# Altium PCB Copy of PCB1.PcbDoc (part 2 of 9)
Units mm, origin at the board's own origin, x right, y up, seen from the top; angles counter-clockwise.
Board outline 100 x 100 mm, 6 copper layers (Top Layer, Int1 (GND), Int2 (Sign), Int3 (Sign), Int4 (PWR), Bottom Layer), stack 1.538 mm thick; 614 components, 712 nets, 3013 pads, 501 vias.
Unrouted connection lines stored in the file: 259.
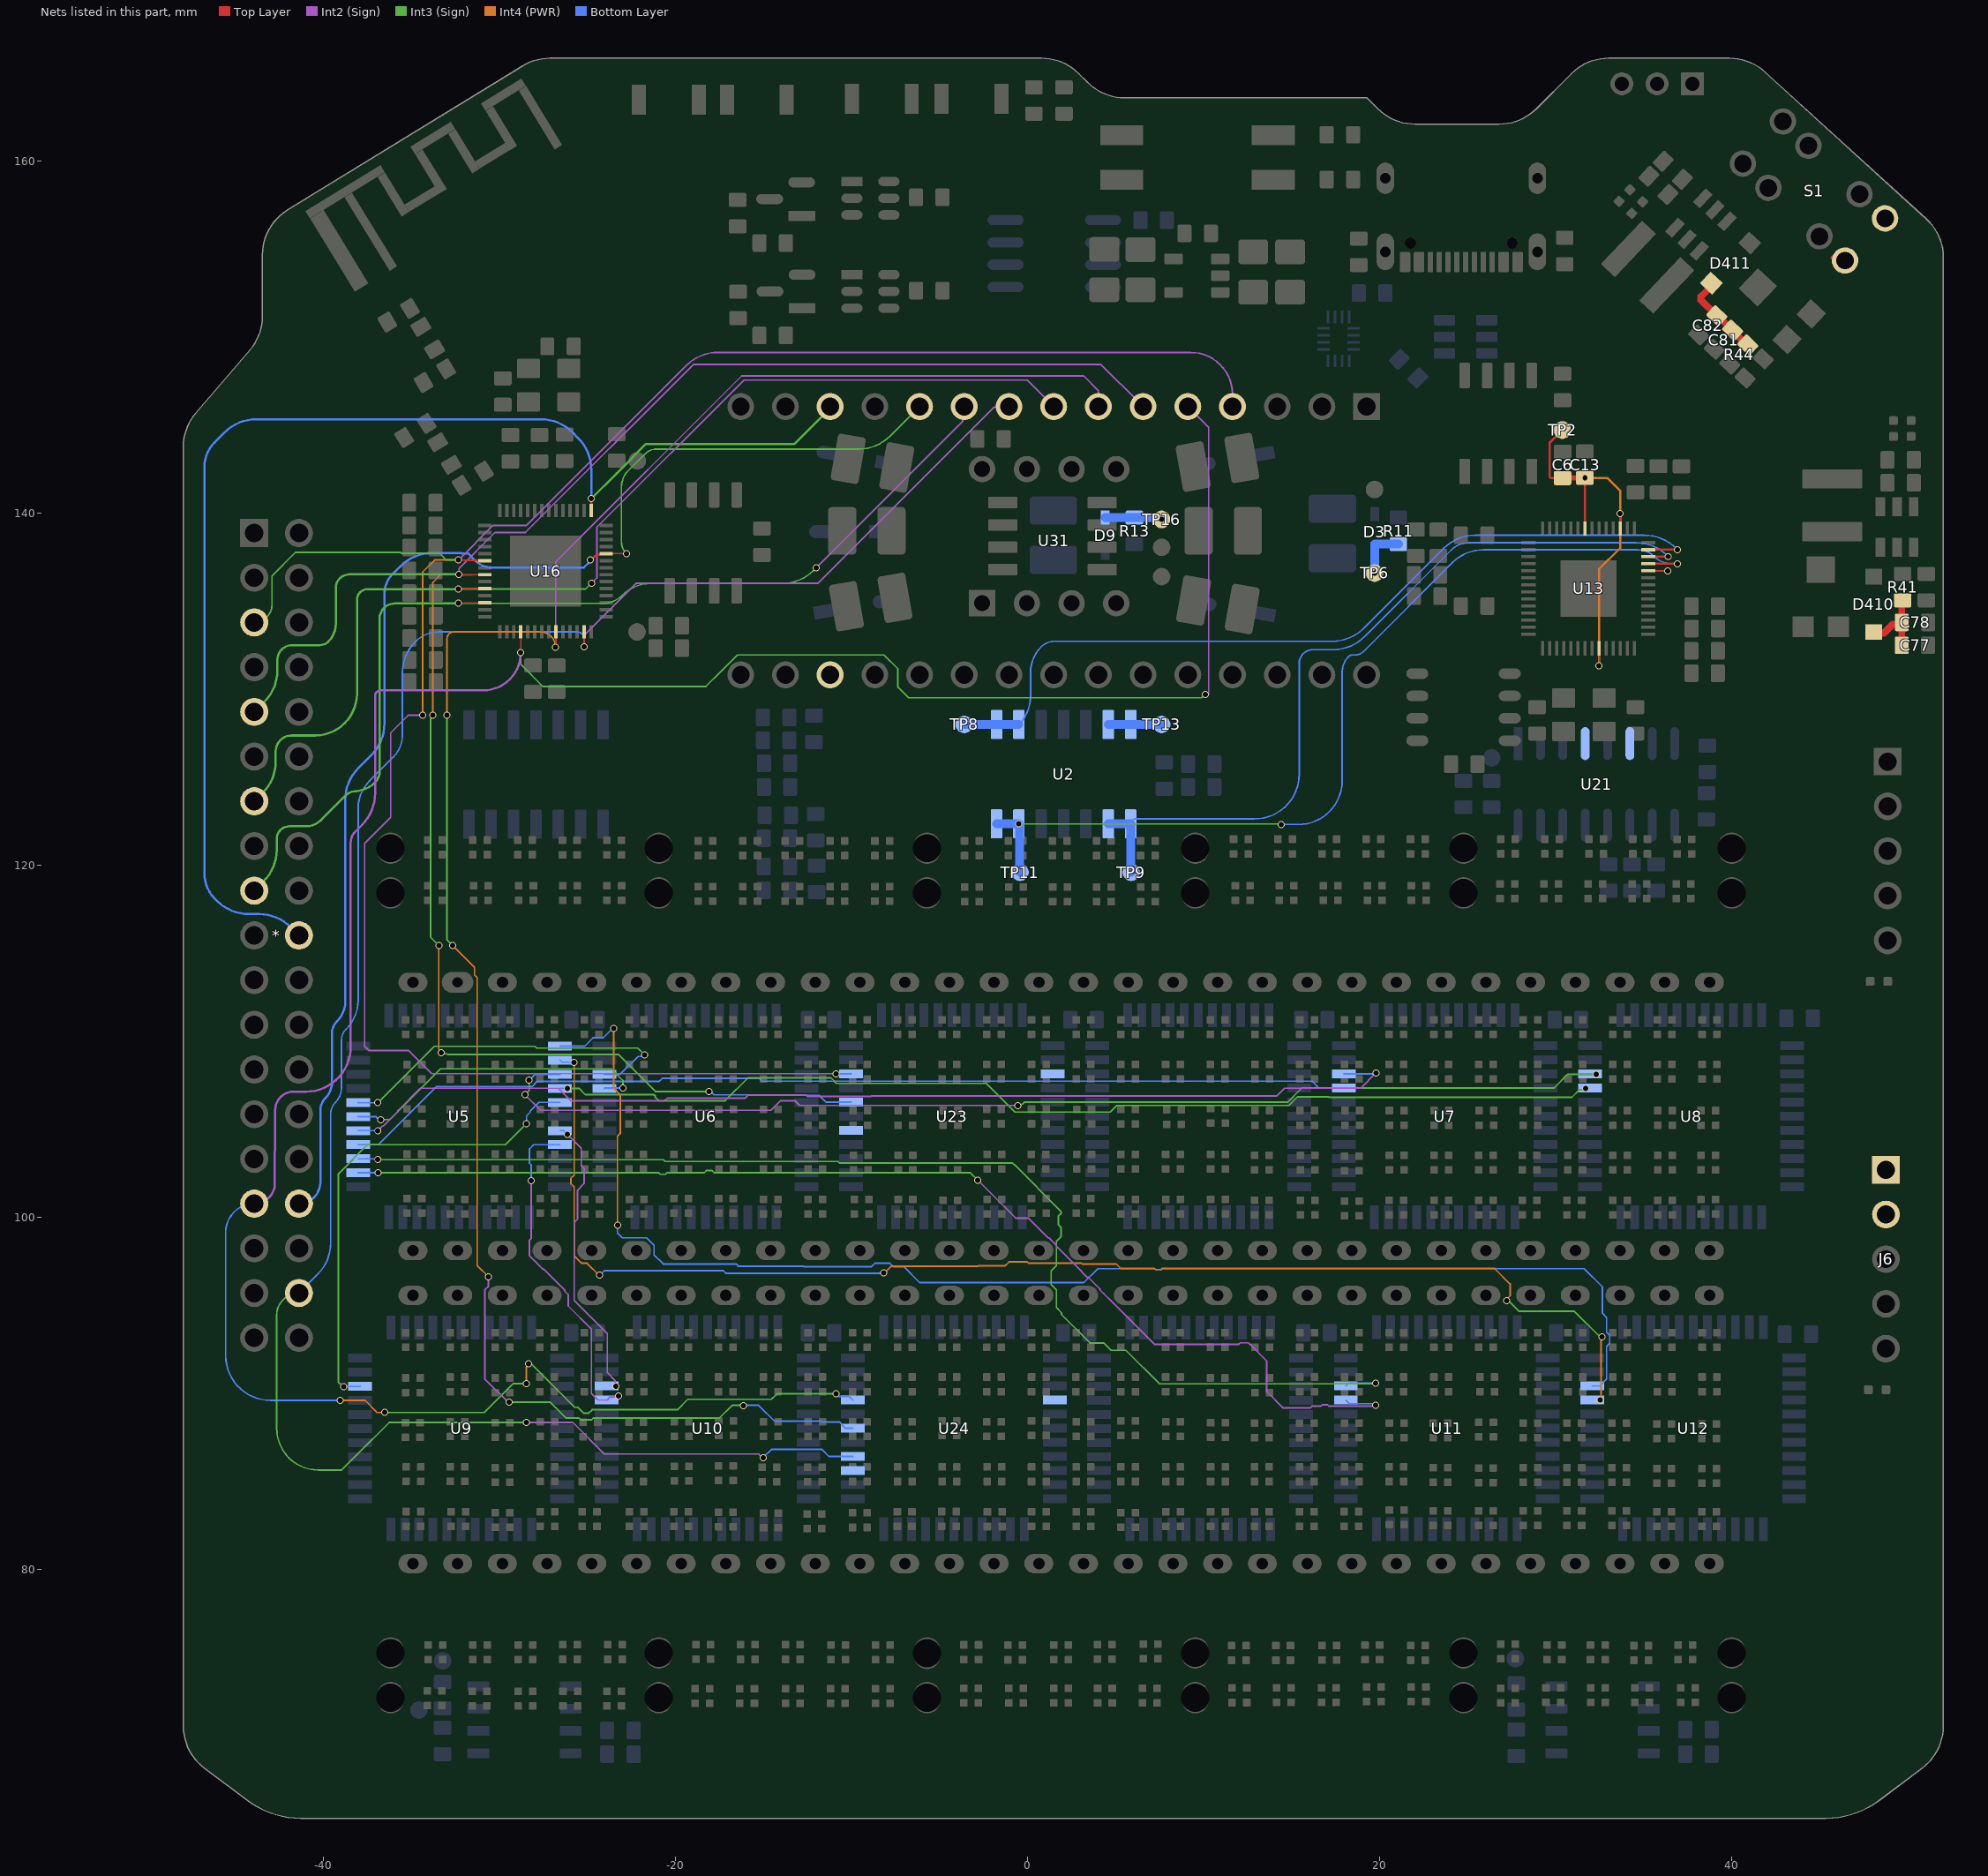
[diagram p6: the nets of this part, all layers, seen from the top]

## Footprints (in the part's own frame and the unit in brackets; to place one, negate y for a bottom-side part, rotate by r counter-clockwise, add the part's x,y. Pads: shape width x height; smd on the part's side, far side on the other; paste and mask are expansions set on the pad) (continued)
Breadboard_CustomClips_CorrectPins_1 [mm]
  rrect100% 1.65x1.1 hole 0.65 slot 1.45 at 0 deg: 1(-36.83,1.27) 1(-36.83,16.51) 2(-34.29,1.27) 3(-31.75,1.27) 3(-31.75,16.51) 4(-29.21,1.27) 4(-29.21,16.51) 5(-26.67,1.27) 5(-26.67,16.51) 6(-24.13,1.27) 6(-24.13,16.51) 7(-21.59,1.27) 7(-21.59,16.51) 8(-19.05,1.27) 8(-19.05,16.51) 9(-16.51,1.27) 9(-16.51,16.51) 10(-13.97,1.27) 10(-13.97,16.51) 11(-11.43,1.27) 11(-11.43,16.51) 12(-8.89,1.27) 12(-8.89,16.51) 13(-6.35,1.27) 13(-6.35,16.51) 14(-3.81,1.27) 14(-3.81,16.51) 15(-1.27,1.27) 15(-1.27,16.51) 16(1.27,1.27) 16(1.27,16.51) 17(3.81,1.27) 17(3.81,16.51) 18(6.35,1.27) 18(6.35,16.51) 19(8.89,1.27) 19(8.89,16.51) 20(11.43,1.27) 20(11.43,16.51) 21(13.97,1.27) 21(13.97,16.51) 22(16.51,1.27) 22(16.51,16.51) 23(19.05,1.27) 23(19.05,16.51) 24(21.59,1.27) 24(21.59,16.51) 25(24.13,1.27) 25(24.13,16.51) 26(26.67,1.27) 26(26.67,16.51) 27(29.21,1.27) 27(29.21,16.51) 28(31.75,1.27) 28(31.75,16.51) 29(34.29,1.27) 29(34.29,16.51) 30(36.83,1.27) 30(36.83,16.51) 31(-36.83,-16.51) 31(-36.83,-1.27) 32(-34.29,-16.51) 32(-34.29,-1.27) 33(-31.75,-16.51) 33(-31.75,-1.27) 34(-29.21,-16.51) 34(-29.21,-1.27) 35(-26.67,-16.51) 35(-26.67,-1.27) 36(-24.13,-16.51) 36(-24.13,-1.27) 37(-21.59,-16.51) 37(-21.59,-1.27) 38(-19.05,-16.51) 38(-19.05,-1.27) 39(-16.51,-16.51) 39(-16.51,-1.27) 40(-13.97,-16.51) 40(-13.97,-1.27) 41(-11.43,-16.51) 41(-11.43,-1.27) 42(-8.89,-16.51) 42(-8.89,-1.27) 43(-6.35,-16.51) 43(-6.35,-1.27) 44(-3.81,-16.51) 44(-3.81,-1.27) 45(-1.27,-16.51) 45(-1.27,-1.27) 46(1.27,-16.51) 46(1.27,-1.27) 47(3.81,-16.51) 47(3.81,-1.27) 48(6.35,-16.51) 48(6.35,-1.27) 49(8.89,-16.51) 49(8.89,-1.27) 50(11.43,-16.51) 50(11.43,-1.27) 51(13.97,-16.51) 51(13.97,-1.27) 52(16.51,-16.51) 52(16.51,-1.27) 53(19.05,-16.51) 53(19.05,-1.27) 54(21.59,-16.51) 54(21.59,-1.27) 55(24.13,-16.51) 55(24.13,-1.27) 56(26.67,-16.51) 56(26.67,-1.27) 57(29.21,-16.51) 57(29.21,-1.27) 58(31.75,-16.51) 58(31.75,-1.27) 59(34.29,-16.51) 59(34.29,-1.27) 60(36.83,-16.51) 60(36.83,-1.27)
  rrect100% 1.8x1.2 hole 0.6 slot 1.5 at 0 deg: 2(-34.29,16.51)
  rrect100% 1.5x1.8 hole 1.6 slot 0.9 at 0 deg: 61(-38.1,24.13) 61(-22.86,24.13) 61(-7.62,24.13) 61(7.62,24.13) 61(22.86,24.13) 61(38.1,24.13) 62(-38.1,21.59) 62(-22.86,21.59) 62(-7.62,21.59) 62(7.62,21.59) 62(22.86,21.59) 62(38.1,21.59) 63(-38.1,-21.59) 63(-22.86,-21.59) 63(-7.62,-21.603) 63(7.62,-21.59) 63(22.86,-21.59) 63(38.1,-21.59) 64(-38.1,-24.13) 64(-22.86,-24.13) 64(-7.62,-24.13) 64(7.62,-24.13) 64(22.86,-24.13) 64(38.1,-24.13)
  silkscreen extent -40.64,-27.94 41.91,26.67
CAP_0603 [mm]
  rrect25% 0.8x1 smd: 1(-0.75,0) 2(0.75,0)
  body extent -0.8,-0.4 0.8,0.4, height 0.51
CAP_0805 [mm]
  rrect25% 1.4x1.7 smd: 1(-1.143,0) 2(1.143,0)
  body extent -1.15,-0.76 1.15,0.79, height 1.01
CAP_1210 [mm]
  rrect25% 1.6x2.7 smd: 1(-1.4,0) 2(1.4,0)
  body extent -1.6,-1.25 1.6,1.25, height 2.5
CTS-219-2LPST_V [mil] "SMD, 4-Leads, Body 6.706x6.553mm, Pitch 2.54mm"
  rect 96x44 smd: 1(-169.5,50) 2(-169.5,-50) 3(169.5,-50) 4(169.5,50)
  silkscreen extent -244,-129 132,129, body extent -132,-129 132,129, height 163
D0008A_L [mm] "SOIC, 8-Leads, Body 5x4mm, Pitch 1.27mm, IPC High Density"
  rrect18% 1.25x0.55 smd: 1(-2.625,1.905) 2(-2.625,0.635) 3(-2.625,-0.635) 4(-2.625,-1.905) 5(2.625,-1.905) 6(2.625,-0.635) 7(2.625,0.635) 8(2.625,1.905)
  silkscreen extent -2.75,-2.5 1.6,2.85, body extent -3,-2.45 3,2.45, height 1.63
D0008A_M [mm] "SOIC, 8-Leads, Body 5x4mm, Pitch 1.27mm, IPC Low Density"
  rrect15% 1.65x0.65 smd: 1(-2.825,1.905) 2(-2.825,0.635) 3(-2.825,-0.635) 4(-2.825,-1.905) 5(2.825,-1.905) 6(2.825,-0.635) 7(2.825,0.635) 8(2.825,1.905)
  silkscreen extent -2.95,-2.5 1.6,2.9, body extent -3,-2.45 3,2.45, height 1.63
D0014A_M [mm] "SOIC, 14-Leads, Body 8.75x4mm, Pitch 1.27mm, IPC Low Density"
  rrect15% 1.65x0.65 smd: 1(-2.825,3.81) 2(-2.825,2.54) 3(-2.825,1.27) 4(-2.825,0) 5(-2.825,-1.27) 6(-2.825,-2.54) 7(-2.825,-3.81) 8(2.825,-3.81) 9(2.825,-2.54) 10(2.825,-1.27) 11(2.825,0) 12(2.825,1.27) 13(2.825,2.54) 14(2.825,3.81)
  silkscreen extent -2.95,-4.38 1.6,4.81, body extent -3.02,-4.32 3.02,4.32, height 1.59
FAIR-SOD-523F-2_V [mm] "SMD, 2-Leads, Body 1.2x0.8mm, Height 0.7mm"
  rect 0.8x0.5 smd: 1(-1,0) 2(1,0)
  silkscreen extent -0.2,-0.38 0.24,0.38, body extent -0.6,-0.4 0.6,0.4, height 0.71
FP-22-28-6054-MFG [mm]
  rect 1.57x1.57 hole 1.02 paste-2539.97 mask+0: 1(5.08,0)
  round 1.57 hole 1.02 paste-2539.97 mask+0: 2(2.54,0) 3(0,0) 4(-2.54,0) 5(-5.08,0)
  silkscreen extent -6.48,-1.37 7.2,1.37, body extent -6.58,-9.52 6.58,1.47, height 0.25
FP-318-08-IPC_B [mm]
  rect 1.524x0.578 smd paste+0 mask+0: 1(-0.91,0.95)
  rrect100% 1.524x0.578 smd paste+0 mask+0: 2(-0.91,-0.95) 3(0.91,0)
  silkscreen extent -0.65,-1.45 0.65,1.45, body extent -1.92,-1.7 1.92,1.7, height 0.25
FP-951103-8622-AR-MFG [mm]
  rect 1.3x1.3 hole 0.8 paste-2539.97 mask+0: 1(-2,0)
  round 1.3 hole 0.8 paste-2539.97 mask+0: 2(0,0) 3(2,0)
  silkscreen extent -3.68,-1.1 3.1,1.1, body extent -3.2,-1.2 3.2,1.2, height 0.25
FP-B3U-1000P-MFG [mm]
  rect 0.8x1.7 smd paste+0 mask+0: 1(-1.7,0) 2(1.7,0)
  silkscreen extent -1.6,-1.35 1.6,1.35, body extent -2.2,-1.45 2.2,1.45, height 0.25
FP-DBV0006A-IPC_C [mm]
  rect 1.205x0.53 smd paste+0 mask+0: 1(-1.05,0.95)
  rrect100% 1.205x0.53 smd paste+0 mask+0: 2(-1.05,0) 3(-1.05,-0.95) 4(1.05,-0.95) 5(1.05,0) 6(1.05,0.95)
  silkscreen extent -2.33,-1.45 0.05,1.45, body extent -1.75,-1.55 1.75,1.55, height 0.25
FP-SO16_Narrow-0016020-IPC_C [mm]
  rect 1.874x0.501 smd paste+0 mask+0: 1(-2.316,4.445)
  rrect100% 1.874x0.501 smd paste+0 mask+0: 2(-2.316,3.175) 3(-2.316,1.905) 4(-2.316,0.635) 5(-2.316,-0.635) 6(-2.316,-1.905) 7(-2.316,-3.175) 8(-2.316,-4.445) 9(2.316,-4.445) 10(2.316,-3.175) 11(2.316,-1.905) 12(2.316,-0.635) 13(2.316,0.635) 14(2.316,1.905) 15(2.316,3.175) 16(2.316,4.445)
  silkscreen extent -4.25,-4.95 0.88,4.95, body extent -3,-4.95 3,4.95, height 1.75
FP-SOD123-IPC_A [mm]
  rect 1.557x0.742 smd paste+0 mask+0: 1(-1.7,0)
  rrect100% 1.557x0.742 smd paste+0 mask+0: 2(1.7,0)
  silkscreen extent -3.39,-0.78 1.33,0.78, body extent -1.83,-0.78 1.83,0.78, height 1.45
FP-SOD123-MFG [mm]
  rect 0.9x0.95 smd paste+0 mask+0: 1(-1.575,0) 2(1.575,0)
  silkscreen extent -2.75,-0.85 0.75,0.85, body extent -2.12,-0.95 2.12,0.95, height 0.25
HDR-TH_38P-P2.54-H-M-R2-C19-S2.54 [mm]
  rect 1.6x1.6 hole 1.05: 1(-22.86,-1.27)
  round 1.6 hole 1.05: 2(-22.86,1.27) 3(-20.32,-1.27) 4(-20.32,1.27) 5(-17.78,-1.27) 6(-17.78,1.27) 7(-15.24,-1.27) 8(-15.24,1.27) 9(-12.7,-1.27) 10(-12.7,1.27) 11(-10.16,-1.27) 12(-10.16,1.27) 13(-7.62,-1.27) 14(-7.62,1.27) 15(-5.08,-1.27) 16(-5.08,1.27) 17(-2.54,-1.27) 18(-2.54,1.27) 19(0,-1.27) 20(0,1.27) 21(2.54,-1.27) 22(2.54,1.27) 23(5.08,-1.27) 24(5.08,1.27) 25(7.62,-1.27) 26(7.62,1.27) 27(10.16,-1.27) 28(10.16,1.27) 29(12.7,-1.27) 30(12.7,1.27) 31(15.24,-1.27) 32(15.24,1.27) 33(17.78,-1.27) 34(17.78,1.27) 35(20.32,-1.27) 36(20.32,1.27) 37(22.86,-1.27) 38(22.86,1.27)
  silkscreen extent -24.31,-11.31 24.31,-2.81, body extent -24.14,-11.31 24.13,1.59, height 5
IC57_RP2040 [mil]
  rect 32x7 smd paste+0 mask+0: 1(-134,102.36) 2(-134,86.61) 3(-134,70.87) 4(-134,55.12) 5(-134,39.37) 6(-134,23.62) 7(-134,7.87) 8(-134,-7.87) 9(-134,-23.62) 10(-134,-39.37) 11(-134,-55.12) 12(-134,-70.87) 13(-134,-86.61) 14(-134,-102.36) 29(134,-102.36) 30(134,-86.61) 31(134,-70.87) 32(134,-55.12) 33(134,-39.37) 34(134,-23.62) 35(134,-7.87) 36(134,7.87) 37(134,23.62) 38(134,39.37) 39(134,55.12) 40(134,70.87) 41(134,86.61) 42(134,102.36)
  rect 7x32 smd paste+0 mask+0: 15(-102.36,-134) 16(-86.61,-134) 17(-70.87,-134) 18(-55.12,-134) 19(-39.37,-134) 20(-23.62,-134) 21(-7.87,-134) 22(7.87,-134) 23(23.62,-134) 24(39.37,-134) 25(55.12,-134) 26(70.87,-134) 27(86.61,-134) 28(102.36,-134) 43(102.36,134) 44(86.61,134) 45(70.87,134) 46(55.12,134) 47(39.37,134) 48(23.62,134) 49(7.87,134) 50(-7.87,134) 51(-23.62,134) 52(-39.37,134) 53(-55.12,134) 54(-70.87,134) 55(-86.61,134) 56(-102.36,134)
  rect 126x126 smd paste-63 mask+0: 57(0,0)
  silkscreen extent -170,-170 170,170, body extent -138,-138 138,138, height 35
IND_0603 [mm]
  rrect25% 0.8x1 smd: 1(-0.75,0) 2(0.75,0)
  body extent -0.81,-0.37 0.81,0.37, height 0.87
LED_0603_RED [mm]
  rrect25% 0.8x1 smd: A(0.75,0) K(-0.75,0)
  silkscreen extent -1.5,-0.8 -0.8,0.8, body extent -0.8,-0.4 0.8,0.4, height 0.6
MODULE_ABX00053 [mil]
  rect 60x60 / inner round 60 / far side rect 60x60 hole 40: 1(-700,-300)
  round 60 hole 40: 2(-600,-300) 3(-500,-300) 4(-400,-300) 5(-300,-300) 6(-200,-300) 7(-100,-300) 8(0,-300) 9(100,-300) 10(200,-300) 11(300,-300) 12(400,-300) 13(500,-300) 14(600,-300) 15(700,-300) 16(700,300) 17(600,300) 18(500,300) 19(400,300) 20(300,300) 21(200,300) 22(100,300) 23(0,300) 24(-100,300) 25(-200,300) 26(-300,300) 27(-400,300) 28(-500,300) 29(-600,300) 30(-700,300)
ONSC-SOIC-8-751BD-01_L [mm] "SOIC, 8-Leads, Body 4.90x3.90mm, Pitch 1.27mm, IPC High Density"
  oval 1.25x0.6 smd: 1(-2.625,1.905) 2(-2.625,0.635) 3(-2.625,-0.635) 4(-2.625,-1.905) 5(2.625,-1.905) 6(2.625,-0.635) 7(2.625,0.635) 8(2.625,1.905)
  silkscreen extent -2.75,-2.5 1.6,2.88, body extent -3,-2.5 3,2.5, height 1.75
P0008A [mm] "DIP, 8-Leads, Body 10.15x6.6mm, Pitch 2.54mm"
  rect 1.5x1.5 hole 0.9: 1(-3.81,3.81)
  round 1.5 hole 0.9: 2(-3.81,1.27) 3(-3.81,-1.27) 4(-3.81,-3.81) 5(3.81,-3.81) 6(3.81,-1.27) 7(3.81,1.27) 8(3.81,3.81)
  silkscreen extent -3.93,-5.1 2.65,5.23, body extent -3.95,-5.07 3.95,5.07, height 5.08
PAD_RND_1MM#1 [mm]
  round 1 smd paste-0.5 mask+0: 1(0,0)
PAD_RND_1MM#2 [mm]
  round 1 smd paste-0.5 mask+0: 1(0,0.05)
PG-LQFP-44 [mm]
  rect 1.35x0.5 smd: 1(-5.735,4) 2(-5.735,3.2) 3(-5.735,2.4) 4(-5.735,1.6) 5(-5.735,0.8) 6(-5.735,0) 7(-5.735,-0.8) 8(-5.735,-1.6) 9(-5.735,-2.4) 10(-5.735,-3.2) 11(-5.735,-4) 23(5.735,-4) 24(5.735,-3.2) 25(5.735,-2.4) 26(5.735,-1.6) 27(5.735,-0.8) 28(5.735,0) 29(5.735,0.8) 30(5.735,1.6) 31(5.735,2.4) 32(5.735,3.2) 33(5.735,4)
  rect 0.5x1.35 smd: 12(-4,-5.735) 13(-3.2,-5.735) 14(-2.4,-5.735) 15(-1.6,-5.735) 16(-0.8,-5.735) 17(0,-5.735) 18(0.8,-5.735) 19(1.6,-5.735) 20(2.4,-5.735) 21(3.2,-5.735) 22(4,-5.735) 34(4,5.735) 35(3.2,5.735) 36(2.4,5.735) 37(1.6,5.735) 38(0.8,5.735) 39(0,5.735) 40(-0.8,5.735) 41(-1.6,5.735) 42(-2.4,5.735) 43(-3.2,5.735) 44(-4,5.735)
  silkscreen extent -7.08,-4.53 4.53,4.53, body extent -6,-6 6,6, height 1.5
QFN56_7X7_EXP [mm]
  rect 0.755x0.199 smd paste+0 mask+0: 1(-3.452,2.6) 2(-3.452,2.2) 3(-3.452,1.8) 4(-3.452,1.4) 5(-3.452,1) 6(-3.452,0.6) 7(-3.452,0.2) 8(-3.452,-0.2) 9(-3.452,-0.6) 10(-3.452,-1) 11(-3.452,-1.4) 12(-3.452,-1.8) 13(-3.452,-2.2) 14(-3.452,-2.6) 29(3.452,-2.6) 30(3.452,-2.2) 31(3.452,-1.8) 32(3.452,-1.4) 33(3.452,-1) 34(3.452,-0.6) 35(3.452,-0.2) 36(3.452,0.2) 37(3.452,0.6) 38(3.452,1) 39(3.452,1.4) 40(3.452,1.8) 41(3.452,2.2) 42(3.452,2.6)
  rect 0.199x0.755 smd paste+0 mask+0: 15(-2.6,-3.452) 16(-2.2,-3.452) 17(-1.8,-3.452) 18(-1.4,-3.452) 19(-1,-3.452) 20(-0.6,-3.452) 21(-0.2,-3.452) 22(0.2,-3.452) 23(0.6,-3.452) 24(1,-3.452) 25(1.4,-3.452) 26(1.8,-3.452) 27(2.2,-3.452) 28(2.6,-3.452) 43(2.6,3.452) 44(2.2,3.452) 45(1.8,3.452) 46(1.4,3.452) 47(1,3.452) 48(0.6,3.452) 49(0.2,3.452) 50(-0.2,3.452) 51(-0.6,3.452) 52(-1,3.452) 53(-1.4,3.452) 54(-1.8,3.452) 55(-2.2,3.452) 56(-2.6,3.452)
  rect 4.039x4.039 smd paste-2.019 mask+0: 57(0,0)
  silkscreen extent -4.34,-4.34 4.34,4.34, body extent -3.52,-3.52 3.52,3.52, height 0.89
RES_0603 [mm]
  rrect25% 0.8x1 smd: 1(-0.75,0) 2(0.75,0)
  body extent -0.8,-0.43 0.8,0.43, height 0.52
SOIC-8 [mm] "SOIC, 8-Leads, Body 4.91x3.90mm, Pitch 1.27mm, IPC Medium Density"
  rrect25% 1.45x0.6 smd: 1(-2.725,1.905) 2(-2.725,0.635) 3(-2.725,-0.635) 4(-2.725,-1.905) 5(2.725,-1.905) 6(2.725,-0.635) 7(2.725,0.635) 8(2.725,1.905)
  silkscreen extent -2.85,-2.3 1.6,2.88, body extent -3,-2.5 3,2.5, height 1.75
SOIC-8_L4.9-W3.9-P1.27-LS6.0-BL [mm]
  rrect100% 0.59x2.05 smd: 1(-1.91,-2.77) 2(-0.63,-2.77) 3(0.63,-2.77) 4(1.9,-2.77) 5(1.9,2.77) 6(0.63,2.77) 7(-0.63,2.77) 8(-1.91,2.77)
  silkscreen extent -2.8,-2.92 2.53,1.52, body extent -2.45,-2.8 2.45,3.31, height 1.6
SolderJumper_Single [mm]
  rrect35% 0.5x0.5 smd mask+0: 1(-0.5,0) 2(0.5,0)
  silkscreen extent -0.95,-0.44 0.95,0.44
SOT-23-5 [mm] "SOT23, 5-Leads, Body 2,90x2,80mm, Pitch 0,95mm, IPC Medium Density"
  rrect25% 1.05x0.6 smd: 1(-1.325,0.95) 2(-1.325,0) 3(-1.325,-0.95) 4(1.325,-0.95) 5(1.325,0.95)
  silkscreen extent -1.45,-1.45 0.4,1.92, body extent -1.4,-1.45 1.4,1.45, height 1.45
SOT-23-6 [mm]
  rrect25% 0.6x1.2 smd: 1(-0.95,-1.2) 2(0,-1.2) 3(0.95,-1.2) 4(0.95,1.2) 5(0,1.2) 6(-0.95,1.2)
  silkscreen extent -1.75,-1.63 -1.75,-0.76, body extent -1.45,-1.4 1.45,1.4, height 1.45
SOT-23-6_L2.9-W1.6-P0.95-LS2.8-BL [mm]
  rect 0.53x1.07 smd: 1(-0.95,-1.15) 2(0,-1.15) 3(0.95,-1.15) 4(0.95,1.15) 5(0,1.15) 6(-0.95,1.15)
  silkscreen extent -1.82,-1.45 1.54,0.89, body extent -1.45,-1.41 1.45,1.41, height 1.6
SW-TH_SSSS223900 [mm]
  round 1.5 hole 1: 1(-4,-1.65) 2(-2,-1.65) 3(2,-1.65) 4(4,-1.65) 5(-4,1.65) 6(-2,1.65) 7(2,1.65) 8(4,1.65)
  silkscreen extent -6.5,-2 6.5,2, body extent -6.65,-3.66 6.35,1.89, height 3.31
UMLP16_1P8X2P6_ONS [mil]
  rect 28x6 smd paste+0 mask+0: 1(-33.5,23.62) 2(-33.5,7.87) 3(-33.5,-7.87) 4(-33.5,-23.62) 9(33.5,-23.62) 10(33.5,-7.87) 11(33.5,7.87) 12(33.5,23.62)
  rect 6x28 smd paste+0 mask+0: 5(-23.62,-49) 6(-7.87,-49) 7(7.87,-49) 8(23.62,-49) 13(23.62,49) 14(7.87,49) 15(-7.87,49) 16(-23.62,49)
  silkscreen extent -41,-56 68,56, body extent -36,-51 36,51, height 20
USB4105-GF-A-060 [mm]
  rrect25% 0.6x1.15 smd mask+0.05: A1B12(-3.2,2.378) A4B9(-2.4,2.378) B1A12(3.2,2.378) B4A9(2.4,2.378)
  rrect25% 0.3x1.15 smd mask+0.05: A5(-1.25,2.378) A6(-0.25,2.378) A7(0.25,2.378) A8(1.25,2.378) B5(1.75,2.378) B6(0.75,2.378) B7(-0.75,2.378) B8(-1.75,2.378)
  round 0.65 hole 0.65 unplated mask+0.05: MH(-2.89,1.303) MH(2.89,1.303)
  oval 1x1.8 hole 0.6 slot 1.4 at 90 deg: SH(-4.32,-2.377) SH(4.32,-2.377)
  oval 1x2.1 hole 0.6 slot 1.7 at 90 deg: SH(-4.32,1.803) SH(4.32,1.803)
  silkscreen extent -4.25,-4.5 4.25,0.25, body extent -4.47,-4.97 4.47,2.73, height 3.27
XL-1010RGBC-WS2812B [mm]
  rrect15% 0.43x0.43 smd: 1(-0.415,0.415) 2(0.415,0.415) 3(-0.415,-0.415) 4(0.415,-0.415)
XTAL_3225 [mm]
  rrect10% 1.3x1.1 smd: 1(-1.15,-0.95) 2(1.15,-0.95) 3(1.15,0.95) 4(-1.15,0.95)
  silkscreen extent -2.23,-1.89 -1,-1, body extent -1.6,-1.28 1.6,1.22, height 0.61

## Part data
*: LCSC Part=C18198033, Reference=U3
ANT1: library part ANT_IFA_USB_2_4GHZ_50R, "Inverted F 2.4GHz ISM PCB Antenna 50 Ohm", ComponentLink1Description=Datasheet, ComponentLink1URL=https://www.ti.com/lit/an/swra117d/swra117d.pdf
B1 B2: LCSC Part=C78162, Datasheet=https://lcsc.com/product-detail/DC-DC-Converters_SX1308_C78162.html
C1 C2 C3 C4: library part CAP_0805, "Capacitor SMD 0805"
C5 C6 C7 C8 C9 C10 C11 C12 C13 C14 C15 C16 C17 C26 C27 C28 C29 C30 C31 C32 C33 C44 C45 C46 C47 C48 C49 C50 C51 C52 C53 C54 C55 C56 C57 C58 C59 C60 C61 C62 C63 C64 C65 C66 C67 C68 C69 C70 C71 C72 C73 C74 C75 C76 C77 C78 C79 C80 C81 C82 C83 C84 C85 C86: library part CAP_0603, "Capacitor SMD 0603"
C18 C19 C20 C21 C22 C23 C24 C25: library part CAP_1210, "Capacitor SMD 1210"
D1: library part LED_0603_RED, "LED 0603 RED SMD"
D2: "Low-Capacitance ESD Protection USB", Manufacturer=STMicroelectronics, Distributor Link=https://www.mouser.de/ProductDetail/STMicroelectronics/USBLC6-2SC6?qs=po45yt2pPpu%2FhNIlwQdTlg%3D%3D, Manufacturer Part Number=USBLC6-2SC6
D3 D9: library part CMP-0881-00001-1, "High Conductance Fast Switching Diode, 75 V, -55 to 150 degC, 2-Pin SOD523F, RoHS", Manufacturer="Fairchild Semiconductor", Temperature Range="-55 to 150 degC", BVR (IR="5 uA)=75 V Min.", CO="4 pF Max.", ComponentLink1Description="Manufacturer URL", ComponentLink1URL=http://www.fairchildsemi.com/, ComponentLink2Description=Datasheet, ComponentLink2URL=http://www.fairchildsemi.com/ds/1N/1N4148WT.pdf, DatasheetVersion="Rev. A2", IR (VR="75 V)=5 uA Max.", Mounting Technology="Surface Mount", PackageDescription="2-Pin Surface Mount Device, Body 1.2 x 0.8 mm, Height 0.7 mm", PackageReference=SOD-523F-2, PartNumber=1N4148WT, RoHS=TRUE, VF="1 V Max."
D4 D5 D6 D7 D8: library part CMP-0303-00003-3, "DIODE SCHOTTKY 40V 1A SOD123", Average Rectified Current=1A, Capacitance=110pF, Case/Package=SOD-123-2, Forward Voltage=450mV, Max Forward Surge Current (Ifsm)=25A, Max Operating Temperature=125°C, Max Power Dissipation=450mW, Max Repetitive Reverse Voltage (Vrrm)=40V, Min Operating Temperature=-65°C, Package Quantity=3000, Peak Reverse Current=50uA, Contact Plating=Tin, Current Rating=1A, Element Configuration=Single, Forward Current=1A, Height=1.25mm, Lead Free="Lead Free", Length=2.85mm, Max Reverse Voltage (DC)=40V, Number of Pins=2, Output Current=1A, Packaging="Tape and Reel", Peak Non-Repetitive Surge Current=25A, Polarity=Standard, Radiation Hardening=No, REACH SVHC="No SVHC", Termination=SMD/SMT, Voltage Rating (DC)=40V, Weight=0.000353oz, Width=1.7mm
D10 D11 D12 D13 D14 D15 D16 D17 D18 D19 D20 D21 D22 D23 D24 D25 D26 D27 D28 D29 D30 D31 D32 D33 D34 D35 D36 D37 D38 D39 D40 D41 D42 D43 D44 D45 D46 D47 D48 D49 D50 D51 D52 D53 D54 D55 D56 D57 D58 D59 D60 D61 D62 D63 D64 D65 D66 D67 D68 D69 D70 D71 D72 D73 D74 D75 D76 D77 D78 D79 D80 D81 D82 D83 D84 D85 D86 D87 D88 D89 D90 D91 D92 D93 D94 D95 D96 D97 D98 D99 D100 D101 D102 D103 D104 D105 D106 D107 D108 D109 D110 D111 D112 D113 D114 D115 D116 D117 D118 D119 D120 D121 D122 D123 D124 D125 D126 D127 D128 D129 D130 D131 D132 D133 D134 D135 D136 D137 D138 D139 D140 D141 D142 D143 D144 D145 D146 D147 D148 D149 D150 D151 D152 D153 D154 D155 D156 D157 D158 D159 D160 D161 D162 D163 D164 D165 D166 D167 D168 D169 D170 D171 D172 D173 D174 D175 D176 D177 D178 D179 D180 D181 D182 D183 D184 D185 D186 D187 D188 D189 D190 D191 D192 D193 D194 D195 D196 D197 D198 D199 D200 D201 D202 D203 D204 D205 D206 D207 D208 D209 D210 D211 D212 D213 D214 D215 D216 D217 D218 D219 D220 D221 D222 D223 D224 D225 D226 D227 D228 D229 D230 D231 D232 D233 D234 D235 D236 D237 D238 D239 D240 D241 D242 D243 D244 D245 D246 D247 D248 D249 D250 D251 D252 D253 D254 D255 D256 D257 D258 D259 D260 D261 D262 D263 D264 D265 D266 D267 D268 D269 D270 D271 D272 D273 D274 D275 D276 D277 D278 D279 D280 D281 D282 D283 D284 D285 D286 D287 D288 D289 D290 D291 D292 D293 D294 D295 D296 D297 D298 D299 D300 D301 D302 D303 D304 D305 D306 D307 D308 D309 D310 D311 D312 D313 D314 D315 D316 D317 D318 D319 D320 D321 D322 D323 D324 D325 D326 D327 D328 D329 D330 D331 D332 D333 D334 D335 D336 D337 D338 D339 D340 D341 D342 D343 D344 D345 D346 D347 D348 D349 D350 D351 D352 D353 D354 D355 D356 D357 D358 D359 D360 D361 D362 D363 D364 D365 D366 D367 D368 D369 D370 D371 D372 D373 D374 D375 D376 D377 D378 D379 D380 D381 D382 D383 D384 D385 D386 D387 D388 D389 D390 D391 D392 D393 D394 D395 D396 D397 D398 D399 D400 D401 D402 D403 D404 D405 D406 D407 D408 D409: "LED; SMD; 2020; RGB; 2x2x0.84mm; 3.7Ã·5.3V; Lens: transparent; 2kHz", Package=None, Check_prices=https://www.snapeda.com/parts/WS2812B2020/Worldsemi/view-part/?ref=eda, MF=WorldSemi, MP=WS2812B2020, SnapEDA_Link=https://www.snapeda.com/parts/WS2812B2020/Worldsemi/view-part/?ref=snap
D410 D411: library part CMP-12790-000026-1, "DIODE SCHOTTKY 20V 500MA SOD123", Capacitance=170pF, Forward Current=0.5A, Manufacturer="Diodes Inc.", Max Junction Temp=+125°C, Max Repetitive Reverse Voltage=20V, Max Surge Forward Current=5.5A, Package=SOD123, Peak Reverse Current=250uA, Temperature="-65°C to +125°C", Temperature Range Low=-65°C, Automotive=No, Category=Diode, ComponentLink2Description=Datasheet, ComponentLink2URL=https://www.diodes.com/assets/Datasheets/ds30051.pdf, Device Class L1="Discrete Semiconductors", Device Class L2=Diodes, Device Class L3="Schottky Diodes", Digikey Description="DIODE SCHOTTKY 20V 500MA SOD123", Footprint Url=https://www.diodes.com/assets/Package-Files/SOD123.pdf, Height=1.45mm, Ipc Land Pattern Name=SOD365155X123-2, Lead Free=Yes, Manufacturer Part Number=B0520LW-7-F, Mouser Description="Schottky Diodes & Rectifiers 20V 410mW", Octopart=https://octopart.com/b0520lw-7-f-diodes+inc.-325707, Reverse Voltage=20V, RoHS=TRUE, Standoff Height=0mm, Temperature Range High=+125°C
J1: library part USB4105-GF-A-060, "USB Connector Type C SMT 12 Pin", Manufacturer=GCT, Distributor Link=https://eu.mouser.com/ProductDetail/GCT/USB4105-GF-A-060?qs=QNEnbhJQKvY2mocwNJzgfA%3D%3D, Manufacturer Part Number=USB4105-GF-A-060
J4: library part CMP-05379-000003-1, "CONN HEADER VERT 3POS 2MM", Current Rating=2A, Manufacturer=3M, Temperature="-55°C to +125°C", Temperature Range High=+125°C, Temperature Range Low=-55°C, Automotive=No, Category=Conn, ComponentLink2Description=Datasheet, ComponentLink2URL=http://multimedia.3m.com/mws/media/1400506O/3m-pin-strip-header-951-series-78-5100-2653-3.pdf, Conn Gender=Male, Conn Orientation=Straight, Contact Material=Gold,Nickel, Device Class L1=Connectors, Device Class L2="Headers and Wire Housings", Device Class L3=unset, Digikey Description="CONN HEADER VERT 3POS 2MM", Height=6.3mm, Lead Free=Yes, Manufacturer Part Number=951103-8622-AR, Mouser Description="Header; PinStrip; CopperAlloy; HighTempThermoplastic; 3Cnts; 1A; RtAngle; 951Series", Number of Contacts=3, Number of Rows=1, Octopart=https://octopart.com/951103-8622-ar-3m-14400669, Package=951103-8622-AR, Pitch=2mm, RoHS=TRUE
J6 J7: library part CMP-04776-001058-1, "KK 100 HDR ASSY RA BKWY 05 CKT 3", Contact Resistance=20mR, Current Rating=4A, Flammability Rating="UL94 V-0", Max Operating Temperature=75°C, Min Operating Temperature=0°C, Package Quantity=1500, Voltage Rating=250V, Contact Plating=Gold, ELV=Compliant, Gender=Male, Glow Wire Compliant=Non-compliant, Mount="Through Hole", Number of Circuits=5, Number of Contacts=5, Number of Positions=5, Number of Rows=1, Orientation="Right Angle", Packaging=Bulk, Pitch=2.54mm, RoHS Compliant=Yes, Series=42376, Termination=Solder
JP1 JP2 JP3 JP4 JP5 JP6: library part SolderJumper_Single, "Solder Jumper Single 0.5mm Pitch"
L1 L2 L3 L4: library part IND_0603, "Inductor SMD 0603"
L5 L6: "Power Inductor SMD ASPI-4030S Series", Manufacturer=ABRACON, Manufacturer Part Number=ASPI-4030S*
Q1 Q2: library part CMP-07173-000101-1, "MOSFET N-CH 50V 220MA SOT-23", Case/Package=SOT-23, Continuous Drain Current (ID)=220mA, Drain to Source Breakdown Voltage=50V, Drain to Source Resistance=3.5R, Gate to Source Voltage (Vgs)=20V, Input Capacitance=27pF, Max Operating Temperature=150°C, Max Power Dissipation=360mW, Min Operating Temperature=-55°C, On-State Resistance=6R, Package Quantity=1, Threshold Voltage=1.3V, Contact Plating=Tin, Current Rating=220mA, Drain to Source Voltage (Vdss)=50V, Dual Supply Voltage=50V, Element Configuration=Single, Fall Time=9ns, Height=0.93mm, Lead Free="Lead Free", Length=2.92mm, Mount="Surface Mount", Nominal Vgs=1.3V, Number of Elements=1, Number of Pins=3, Packaging="Tape and Reel", Power Dissipation=360mW, Radiation Hardening=No, Rds On Max=3.5R, REACH SVHC="No SVHC", Rise Time=9ns, Termination=SMD/SMT, Turn-Off Delay Time=20ns, Turn-On Delay Time=2.5ns, Voltage Rating (DC)=50V, Weight=0.03g, Width=1.3mm
R1 R2 R3 R4 R5 R6 R7 R8 R9 R10 R11 R12 R13 R14 R15 R16 R17 R18 R19 R20 R21 R22 R23 R24 R25 R26 R27 R28 R29 R30 R31 R32 R33 R34 R35 R36 R37 R38 R39 R40 R41 R43 R44 R46 R47 R48 R49 R50: library part RES_0603, "Resistor SMD 0603"
R42 R45: library part CMP-2100-03695-1, "Trimming Potentiometer, 10000 Ohm, -40 to 100 degC, 3-Pin SMD, RoHS, Tape and Reel", Case/Package=SMD/SMT, Colour=Silver, Manufacturer=Bourns, Max Operating Temperature=100degC, Max Power Dissipation=100mW, Min Operating Temperature=-40degC, Package Description="3-Pin Surface Mount Device, Body 3.8 x 3.6 mm", Package Quantity=2500, Package Reference=TC33X-2, Resistance=10KOhm, Temperature Coefficient=250ppm/degreesC, Tolerance=25%, Voltage Rating (DC)=50V, Composition=Potentiometer, Contact Plating=Silver, Datasheet URL=http://www.bourns.com/docs/Product-Datasheets/TC33.pdf, Datasheet Version=42583.0, Depth=3.8mm, Height=0.047inch, Lead Free=LeadFree, Length=3mm, Manufacturer URL=http://www.bourns.com/, Military Standard=Not, Mount=SurfaceMount, Number of Turns=1, Packaging=TapeandReel, Power Rating=100mW, Radiation Hardening=No, REACH SVHC=NoSVHC, RoHSCompliant=true, Taper=Linear, Termination=FootPrint, Weight=29.4mg, Width=0.118inch
S1: LCSC Part=C160874, Datasheet=https://lcsc.com/product-detail/Toggle-Switches_ALPS_SSSS223900_SSSS223900_C160874.html, Reference=SW2
SW1: library part CMP-2000-05532-1, "Surface Mount DIP Switch Auto Placeable, -55 to 85 degC, 4-Pin SMD, RoHS, Tube", Manufacturer="CTS Corporation", Package Description="4-Pin Surface Mount Device, Body 6.7 x 6.55 mm", Actuator Style=LowProfile, Circuitry=SPST, Datasheet URL=http://www.ctscorp.com/wp-content/uploads/2016/01/219-Dec-30-2008.pdf, Datasheet Version=12/2008, Manufacturer URL=http://www.ctscorp.com/, Mounting Technology=SurfaceMount, No of Positions=2, Package Reference=219-2LPST, Sealed Option=Sealed, Termination Style=GullWing, Type=Dip
SW2 SW3 SW4 SW5: library part CMP-2100-03586-2, "SWITCH TACTILE SPST-NO 0.05A 12V", Contact Current Rating=50mA, Contact Resistance=100mR, Insulation Resistance=100MR, Max Operating Temperature=70°C, Max Voltage Rating (DC)=12V, Min Operating Temperature=-25°C, Operating Force=1.5N, Package Quantity=1, Ratings="Dust Proof", Actuator Length=0.4mm, Actuator Type=Standard, Contact Material=Silver, Current Rating=50mA, Depth=2.5mm, Electrical Life=200000Cycles, Height=1.2mm, Illumination Type=Non-Illuminated, Lead Free="Lead Free", Length=4mm, Max Current Rating=50mA, Mechanical Life=200000Cycles, Mount="Surface Mount", Orientation=Straight, Packaging="Tape and Reel", Switch Function=Off-Mom, Switch Travel=0.15mm, Termination=SMD/SMT, Throw Configuration=SPST, Voltage Rating (DC)=12V, Weight=0.000776oz, Width=3mm
TP1 TP2 TP3 TP4 TP5 TP6 TP7 TP8 TP9 TP10 TP11 TP12 TP13 TP14 TP15 TP16: library part TEST_POINT_RND_1MM, "Test Point Round 1mm (NO BOM)"
U1: LCSC Part=C623653, Reference=U5
U2 U18: library part CMP-0055-00733-3, "Low Power Quad Operational Amplifier, 14-pin Narrow SOIC, Pb-Free", Manufacturer="Texas Instruments", Package Reference=D0014A, PackageTopMarking=NSUZXYTTE#*LM324AM, PowerWise=N, Code_IPC=SOIC127P600-14, Code_JEDEC=MS-012AB, ComponentLink1Description="Datasheet URL", ComponentLink1URL=http://www.ti.com/general/docs/lit/getliterature.tsp?genericPartNumber=LM324-N&fileType=pdf, CompType=Amplifiers, PackageDescription="Molded Package S.O., .150in Wide, 14 Lead", PinCount=14, RoHS=Y
U3: "500mA +3.3V Low-Noise LDO Voltage Regulator", Manufacturer=MaxLinear, Manufacturer Part Number=SPX3819M5-L-3-3/TR
U4: "No Description Available", Manufacturer_Name=onsemi, Copyright="Copyright (C) 2025 Ultra Librarian. All rights reserved.", Manufacturer_Part_Number=FSUSB74UMX, RefDes=RefDes, Type=Type
U13: "No Description Available", Manufacturer_Name="Raspberry Pi", Copyright="Copyright (C) 2025 Ultra Librarian. All rights reserved.", Manufacturer_Part_Number=RP2040, RefDes=RefDes, Type=Type
U14 U22: "128M-BIT / SERIAL FLASH MEMORY WITH / DUAL/QUAD SPI & QPI & DTR SOIC-8", Manufacturer=Winbond, Manufacturer Part Number=W25Q128JVSIM
U15: library part CMP-2000-06068-1, "I2C CMOS Serial EEPROM, 1.8 to 5.5 V, -40 to 85 degC, 8-Pin SOIC, RoHS, Tube", Frequency=0.1MHz, Manufacturer="ON Semiconductor", Operating Supply Voltage (Max)=5.5V, Operating Supply Voltage (Min)=1.8V, Operating Supply Voltage (Typ)=2.5/3.3/5V, Operating Temp Range=-40Cto85C, Operating Temperature (Max)=85C, Operating Temperature (Min)=-40C, Operating Temperature Classification=Industrial, Package Description="8-Pin Small Outline Integrated Circuit, Body 4.9 x 3.9 mm, Pitch 1.27 mm", Package Reference=SOIC-8-751BD-01, Package Type=SOICN, Supply Current=1mA, Access Time (Max)=3500ns, Data Retention=100, Datasheet URL=http://www.onsemi.com/pub_link/Collateral/CAT24C256-D.PDF, Datasheet Version="Rev. 14, 01/2014", DELETED=Compliant, Density=262144Bit, Frequency (Max)=0.1MHz, Interface Type=Serial(I2C), Manufacturer URL=http://www.onsemi.com/, Mounting=SurfaceMount, Mounting Technology=SurfaceMount, Organization=32Kx8, Package URL=http://www.onsemi.com/pub_link/Collateral/751BD.PDF, Pin Count=8, Programmable=Yes, Rad Hardened=No, Write Protection=Yes
U16: "No Description Available", Manufacturer_Name="Espressif Systems", Copyright="Copyright (C) 2025 Ultra Librarian. All rights reserved.", Manufacturer_Part_Number=ESP32-S3FN8, RefDes=RefDes, Type=Type
U17: library part CMP-0391-00173-2, "-5 V, Buck / Boost Charge Pump, 100 mA, 3.5 to 15 V Input, -40 to 85 degC, 8-pin DIP (P8), Pb-Free (RoHS)", Manufacturer="Texas Instruments", Switching Frequency(Max)(kHz)=35, Code_JEDEC=MS-001, ComponentLink1Description="Manufacturer URL", ComponentLink1URL=http://www.ti.com/, ComponentLink2Description=Datasheet, ComponentLink2URL=http://www.ti.com/general/docs/lit/getliterature.tsp?genericPartNumber=LT1054&fileType=pdf, ComponentLink3Description="Package Specification", ComponentLink3URL=http://www.ti.com/litv/pdf/mpdi001b, DatasheetVersion=SLVS033F, Eco-Plan="Pb-Free (RoHS)", Iout(Max)(A)=0.1, Iq(Typ)(mA)=2.5, Mounting Technology="Through Hole", PackageDescription="8-Pin Plastic In-Line, Body 9.59 x 6.35 mm, 2.54 mm Pitch", PackageReference=P0008A, PackageVersion=4040082/E, PartNumber=LT1054IP, Preset Vout(V)=-5, Topology=Buck/Boost, Vin(Max)(V)=15, Vin(Min)(V)=3.5, Vout(Max)(V)=-5.2, Vout(Min)(V)=-4.7
U19 U20: library part CMP-0704-00003-2, "Zero-Drift, Bi-Directional Current / Power Monitor, 3 to 5.5 V, -40 to 125 degC, 8-pin SOIC (D8), Green (RoHS & no Sb/Br)", Manufacturer="Texas Instruments", Quiescent Current (+/-)(Typ)(mA)=0.7, Rating=Catalog, CMRR(Min)(dB)=100, Code_JEDEC=MS-012, Common Mode Range(Max)(V)=26, Common Mode Range(Min)(V)=0, ComponentLink1Description="Manufacturer URL", ComponentLink1URL=http://www.ti.com/, ComponentLink2Description=Datasheet, ComponentLink2URL=http://www.ti.com/general/docs/lit/getliterature.tsp?genericPartNumber=INA219&fileType=pdf, ComponentLink3Description="Package Specification", ComponentLink3URL=http://www.ti.com/lit/ml/msoi002j/msoi002j.pdf, DatasheetVersion=SBOS448F, Eco-Plan="Green (RoHS & no Sb/Br)", Gain(V/V)="1, 0.5, 0.25, 0.125", Input Offset (+/-)(Max)(uV)=100, Mounting Technology="Surface Mount", PackageDescription="8-Pin Plastic Small Outline, Body 4.9 x 3.9 mm, Pitch 1.27 mm", PackageReference=D0008A, PackageVersion="4040047-3/M, 06/2011", PartNumber=INA219AIDR, Small-Signal Bandwidth(Typ)(MHz)=0.011, SubFamily="Current Shunt Monitor", Vs(Max)(V)=5.5, Vs(Min)(V)=3
U21: library part CMP-12131-000001-1, "IC OPAMP GP 2 CIRCUIT 16SO", Input Bias Current=0.3uA, Input Offset Voltage=15mV, Manufacturer=STMicroelectronics, Max Dual Supply Voltage=14V, Max Junction Temp=+150°C, Max Supply Voltage=28V, Min Dual Supply Voltage=2V, Min Supply Voltage=4V, Nominal Supply Current=7.5-8mA, Output Current Per Channel=1A, Package="SO16 Narrow-0016020", Temperature="-40°C to +85°C", Temperature Range High=+85°C, Temperature Range Low=-40°C, Voltage Gain=50-70dB, Automotive=No, Category=IC, ComponentLink2Description=Datasheet, ComponentLink2URL=https://www.st.com/resource/en/datasheet/l272.pdf, Device Class L1="Integrated Circuits (ICs)", Device Class L2="Linear ICs", Device Class L3="Amplifiers - Op Amps", Digikey Description="IC OPAMP GP 2 CIRCUIT 16SO", Gain Bandwidth=350kHz, Height=1.75mm, Ipc Land Pattern Name=SOIC127P600X175-16, Lead Free=Yes, Manufacturer Part Number=L272D, Mouser Description="Operational Amplifier, Dual, 250 Khz, 2, 1 V/ S, 4V To 28V, Soic, 16 Rohs Compliant: Yes", Number Of Channels=2, Octopart=https://octopart.com/l272d-stmicroelectronics-410409, RoHS=TRUE, Standoff Height=0.1mm
U27: library part CMP-0065-00023-3, "Switched Capacitor Voltage Converter, 8-pin Narrow SOIC, Pb-Free", Manufacturer="Texas Instruments", PackageTopMarking=NSZXTT*LM26*60M, PowerWise=N, Code_IPC=SOIC127P600-8, Code_JEDEC=MS-012-AA, ComponentLink1Description="Datasheet URL", ComponentLink1URL=http://www.ti.com/general/docs/lit/getliterature.tsp?genericPartNumber=LM2660&fileType=pdf, CompType="Switch Caps", PackageDescription="SOIC Narrow, 4.9 x 3.9 x 1.45mm, 8 Lead, 1.27mm Pitch", PackageReference=D0008A, PinCount=8, RoHS=Y
U29 U30: library part CMP-0859-00203-4, "IC SWITCH SPDT SOT23-6", Case/Package=SOT-23, High Level Output Current=128mA, Max Operating Temperature=125°C, Max Supply Current=10uA, Max Supply Voltage=5.5V, Min Operating Temperature=-40°C, Min Supply Voltage=1.65V, On-State Resistance=15R, Operating Supply Current=1uA, Package Quantity=3000, Bandwidth=300MHz, Contact Plating=Gold, Height=1.3mm, Lead Free="Lead Free", Length=3.05mm, Low Level Output Current=128mA, Mount="Surface Mount", Nominal Supply Current=10uA, Number of Bits=1, Number Of Channels=1, Number of Inputs=1, Number of Outputs=2, Number of Pins=6, Packaging="Tape and Reel", Polarity=Non-Inverting, Propagation Delay=300ps, Radiation Hardening=No, REACH SVHC="No SVHC", RoHS Compliant=Yes, Series=74LVC, Supply Current=10uA, Supply Type=Single, Termination=SMD/SMT, Throw Configuration=SPDT, Turn-Off Delay Time=3.8ns, Turn-On Delay Time=5.7ns, Weight=0.000229oz, Width=1.75mm
U31: "NINA-W102, RP2040 Arduino Nano RP2040 Connect with Headers series ARMÂ® CortexÂ®-M0+ MCU 32-Bit Embedded Evaluation Board", Package=None, Check_prices=https://www.snapeda.com/parts/ABX00053/Arduino/view-part/?ref=eda, Digi-Key_Part_Number=1050-ABX00053-ND, MF=Arduino, MP=ABX00053, Purchase-URL=https://pricing.snapeda.com/search/part/ABX00053/?ref=eda, SnapEDA_Link=https://www.snapeda.com/parts/ABX00053/Arduino/view-part/?ref=snap
X1 X2: library part TSX-3225_24.0000MF15X-AC, "Crystal SMD 24MHz 10PPM 7pF 3225", Manufacturer=Epson, Manufacturer Part Number="TSX-3225 24.0000MF15X-AC"

## Free pads (board coordinates)
  round 3 on Mech3: 1(-44.137,72.181) 1(-44.137,72.181) 1(-43.465,143.219) 1(-43.465,143.219) 1(48.355,72.182) 1(48.363,72.181) 1(48.363,72.181) 1(48.363,149.275) 1(48.363,149.275)

## Via types
v1: diameter 0.4, hole 0.3, Top Layer to Bottom Layer, tented both sides, 494 vias
v2: diameter 0.4, hole 0.3, Top Layer to Bottom Layer, 5 vias
v3: diameter 0.4, hole 0.3, Top Layer to Bottom Layer, tented top, 1 vias
v4: diameter 0.6, hole 0.5, Top Layer to Bottom Layer, 1 vias

## Nets (pads, with @x,y where several pads share a name; then routed paths per layer and width w, separated by ;. In a path a pad name is that pad's centre, name@x,y a point inside that pad or via, vN(x,y) a via of type N, cw(c..) or ccw(c..) an arc to the next point about the centre after c; other vN are vias at no path point)
+1V1: C6.2 C13.2 TP2.1 U13.23 U13.45 U13.50 | length 22.4
  Top Layer w0.09: v1(32.457,131.35) U13.23@32.457,132.331
  Top Layer w0.127: TP2.1@30.371,144.734 29.657,144.019 29.657,142.079 29.731,142.005 C6.2@30.381,142.005 C6.2@30.387,142.011 ; C13.2@31.645,142.011 C13.2@31.651,142.017 v1(31.657,142.011) U13.50@31.657,139.138 ; U13.45@33.657,139.138 v1(33.657,139.992)
  Top Layer w0.3: C6.2@30.387,142.011 C13.2@31.645,142.011
  Int4 (PWR) w0.127: v1(31.657,142.011) 32.929,142.011 33.657,141.283 v1(33.657,139.992) 33.657,138.022 32.457,136.822 v1(32.457,131.35)
+8V: D3.1 R11.1 S1.1 TP6.1 U21.4 | length 3
  Bottom Layer w0.5: v1(19.705,136.608) D3.1@19.705,137.958 19.705,138.258 R11.1@21.055,138.258
+FUNV: C81.2 C82.2 D411.1 J6.1 R44.2 | length 4.9
  Top Layer w0.4: D411.1@38.846,153.075 38.846,152.911 38.248,152.314 38.248,152.125 C82.2@39.147,151.227 39.2,151.227 40.858,149.569 R44.2@40.911,149.569
+OSCV: C77.2 C78.2 D410.1 J6.2 R41.2 | length 4.4
  Top Layer w0.4: D410.1@48.055,133.258 48.114,133.199 48.646,133.199 49.139,133.692 49.619,133.692 C78.2@49.655,133.728 ; C77.2@49.655,132.508 C78.2@49.655,133.728 ; R41.2@49.705,135.058 49.655,135.008 C78.2@49.655,133.808 C78.2@49.655,133.728
-8V: D9.2 R13.1 S1.5 TP16.1 U21.6 | length 3.5
  Top Layer w0.254: S1.5@45.733,154.524 S1.5@46.02,154.524
  Bottom Layer w0.5: D9.2@4.405,139.758 R13.1@6.055,139.758 7.505,139.758 v1(7.605,139.658)
\: *.20 U16.43 U24.25 U31.13 U31.18 | length 73.2
  Top Layer w0.127: U16.43@-24.804,140.17 v1(-24.804,140.83)
  Int3 (Sign) w0.127: v1(-24.804,140.83) -23.359,142.275 -23.355,142.275 -21.689,143.94 -13.26,143.94 -11.229,145.971 U31.13@-11.229,146.067
  Bottom Layer w0.127: *.20@-41.409,116.023 -41.878,116.491 ccw(c-43.674,114.695) -43.674,117.235 -44.258,117.235 cw(c-44.258,119.775) -46.054,117.979 cw(c-44.726,119.552) -46.785,119.552 -46.785,142.626 cw(c-44.808,142.626) -46.206,144.024 -45.625,144.605 cw(c-43.829,142.809) -43.829,145.349 -27.665,145.349 cw(c-27.665,142.809) -25.869,144.605 -25.548,144.284 cw(c-27.344,142.488) -24.804,142.488 v1(-24.804,140.83)
A0: *.5 U16.6 U23.31 U31.4 | length 126.4
  Top Layer w0.09: v1(-32.357,137.355) -32.355,137.353 -32.345,137.353 -31.969,137.336 ccw(c-31.965,137.426) -31.965,137.336 -30.875,137.336 U16.6@-30.857,137.318
  Int2 (Sign) w0.09: v1(-34.38,128.532) -35.203,128.532 -36.202,127.533 -36.202,122.73 -37.68,121.252 -37.68,109.725 -37.435,109.48 -35.179,109.48 -33.865,108.166 v1(-10.891,108.166) ccw(c-11.03,108.166) v1@-10.932,108.265 ; v1(-32.357,137.355) -32.344,137.355 -30.381,139.318 -28.48,139.318 -19.397,148.401 cw(c-17.601,146.605) -17.601,149.145 9.27,149.145 cw(c9.27,146.798) 10.93,148.458 cw(c9.237,146.765) 11.631,146.765 U31.4@11.631,146.067
  Int3 (Sign) w0.09: *.5@-43.949,133.803 ccw(c-43.949,134.807) -42.945,134.807 -42.945,136.107 -42.945,136.45 -41.61,137.785 -40.631,137.785 -35.629,137.785 -35.582,137.738 -33.428,137.738 -33.045,137.355 v1(-32.357,137.355)
  Int4 (PWR) w0.09: v1(-34.38,128.532) -34.38,136.673 -33.698,137.355 v1(-32.357,137.355)
  Bottom Layer w0.09: v1(-10.891,108.166) -10.891,108.161 ccw(c-10.86,108.191) -10.86,108.148 U23.31@-10.048,108.148
A1: *.31 U16.18 U24.30 U31.5 | length 153.5
  Top Layer w0.09: v1(-28.804,132.085) U16.18@-28.804,133.265
  Int2 (Sign) w0.09: U31.5@9.091,146.067 10.275,144.882 10.275,129.714 10.087,129.714 v1(10.08,129.707)
  Int2 (Sign) w0.127: *.31@-43.949,100.783 ccw(c-43.949,101.967) -42.801,101.678 ccw(c-42.924,101.709) -42.797,101.708 -42.797,103.587 cw(c-41.715,103.587) -42.769,103.832 ccw(c-42.893,103.86) -42.768,103.834 ; -42.768,103.835 cw(c-41.392,103.552) -42.768,103.838 ccw(c-42.892,103.864) -42.765,103.864 -42.765,106.095 cw(c-41.715,106.095) -41.715,107.145 -41.013,107.145 ccw(c-41.013,109.685) -38.473,109.685 -38.473,121.267 cw(c-37.535,121.267) -38.198,121.93 -37.824,122.304 ccw(c-39.62,124.1) -37.08,124.1 -37.08,129.622 cw(c-36.757,129.622) -36.757,129.945 -30.944,129.945 ccw(c-30.944,132.085) v1(-28.804,132.085)
  Int3 (Sign) w0.09: v1(-36.535,88.919) -30.879,88.919 -29.246,90.552 v1(-28.495,90.552) ; v1(-28.804,132.085) -28.804,131.426 -27.54,130.162 -18.295,130.162 -17.396,131.061 -16.497,131.96 -8.169,131.96 -7.377,131.168 -7.377,130.122 -6.78,129.525 9.872,129.525 10.054,129.707 v1(10.08,129.707) ; v1(-28.363,91.68) -28.204,91.68 -25.738,89.214 -25.579,89.214 -25.247,88.883 -24.939,88.883 -24.749,89.073 -19.914,89.073 -19.318,89.669 -14.557,89.669 -14.246,89.98 v1(-10.888,89.98)
  Int4 (PWR) w0.09: v1(-39.065,89.608) -37.663,89.608 -36.975,88.919 v1(-36.535,88.919) ; v1(-28.495,90.552) -28.495,91.463 -28.363,91.596 v1(-28.363,91.68)
  Bottom Layer w0.09: *.31@-43.949,100.783 ccw(c-43.949,99.162) -45.57,99.162 -45.57,92.148 ccw(c-43.03,92.148) -43.03,89.608 v1(-39.065,89.608) ; v1(-10.888,89.98) -10.888,89.95 -10.766,89.828 -10.135,89.828 U24.30@-9.93,89.623
A2: *.9 U16.8 U23.29 U31.6 | length 117.2
  Top Layer w0.09: v1(-32.337,136.536) -32.311,136.51 -31.624,136.51 -31.616,136.518 U16.8@-30.857,136.518
  Int2 (Sign) w0.09: v1(-32.337,136.536) -32.315,136.557 -32.315,136.871 -30.268,138.918 -28.54,138.918 -19,148.458 4.16,148.458 6.356,146.262 6.551,146.262 U31.6@6.551,146.067
  Int3 (Sign) w0.09: v1(-33.799,128.532) -33.935,128.396 -33.935,115.925 v1(-33.45,115.44) ; v1(-33.339,109.349) -33.286,109.296 -33.004,109.296 -32.959,109.251 -23.247,109.251 -21.151,107.155 v1(-18.102,107.155)
  Int3 (Sign) w0.127: *.9@-43.949,128.723 -43.375,129.297 ccw(c-45.172,131.093) -42.632,131.093 -42.632,131.7 cw(c-41.846,131.7) -42.402,132.255 cw(c-41.774,131.627) -41.774,132.515 -40.23,132.515 ccw(c-40.23,133.215) -39.735,132.72 ccw(c-40.749,133.734) -39.315,133.734 -39.315,135.764 cw(c-38.543,135.764) -38.543,136.536 v1(-32.337,136.536)
  Int4 (PWR) w0.09: v1(-33.799,128.532) -33.799,136.079 -33.343,136.536 v1(-32.337,136.536) ; v1(-33.45,115.44) -33.464,115.426 -33.464,112.492 -33.468,112.489 -33.468,109.556 -33.339,109.427 v1(-33.339,109.349)
  Bottom Layer w0.09: v1(-18.102,107.155) -18.018,107.155 -17.831,106.968 -13.613,106.968 -13.582,106.938 -11.853,106.938 -11.463,106.548 U23.29@-10.048,106.548
A3: U16.23 U24.28 U31.7 | length 115.1
  Top Layer w0.09: v1(-26.827,132.397) -26.804,132.397 U16.23@-26.804,133.265
  Int2 (Sign) w0.09: v1(-30.639,96.623) -30.639,96.085 -30.849,95.875 -30.849,90.829 -29.565,89.544 -29.471,89.544 v1(-29.471,89.511) ; v1(-26.827,132.397) -26.827,137.241 -16.258,147.81 3.18,147.81 4.011,146.979 U31.7@4.011,146.067
  Int3 (Sign) w0.09: v1(-32.995,128.532) -32.995,115.765 v1(-32.67,115.44) ; v1(-29.471,89.511) -27.14,89.511 -26.238,88.608 -25.51,88.608 -25.405,88.503 -24.782,88.503 -24.676,88.608 -17.512,88.608 -16.797,89.323 -16.191,89.323 v1(-16.165,89.297)
  Int4 (PWR) w0.09: v1(-32.995,128.532) -32.995,132.887 cw(c-32.617,132.887) -32.617,133.265 -27.696,133.265 cw(c-27.696,132.397) v1(-26.827,132.397) v1@-26.827,132.354 ; v1(-32.67,115.44) -31.436,114.206 -31.436,113.791 -31.281,113.636 -31.281,97.265 v1(-30.639,96.623)
  Bottom Layer w0.09: v1(-16.165,89.297) -16.138,89.323 -15.288,89.323 -14.39,88.425 -11.733,88.425 -11.69,88.383 -10.715,88.383 -10.355,88.023 U24.28@-9.93,88.023
A4: *.13 U16.10 U23.27 U31.8 | length 63.7
  Top Layer w0.09: v1(-32.357,135.701) -31.981,135.718 cw(c-31.977,135.628) -31.977,135.718 U16.10@-30.857,135.718
  Int2 (Sign) w0.09: v1(-24.792,136.023) -24.479,136.337 -24.479,139.219 -16.128,147.569 -0.031,147.569 U31.8@1.471,146.067
  Int3 (Sign) w0.09: v1(-32.357,135.701) -25.114,135.701 v1(-24.792,136.023)
  Int3 (Sign) w0.127: *.13@-43.949,123.643 -43.458,124.134 ccw(c-45.204,125.88) -42.735,125.88 -42.735,126.465 cw(c-41.82,126.465) -41.82,127.38 -40.485,127.38 ccw(c-40.485,129.75) -38.115,129.75 -38.115,135.09 cw(c-37.517,135.09) -37.517,135.688 -32.811,135.688 ccw(c-32.811,135.815) -32.808,135.689 v1(-32.357,135.701)
A5: *.36 U16.27 U24.26 U31.9 | length 125.3
  Top Layer w0.09: v1(-25.204,132.429) U16.27@-25.204,133.265
  Int2 (Sign) w0.09: v1(-28.479,88.353) -25.855,88.353 -24.066,86.564 -15.297,86.564 -15.085,86.352 v1(-15.035,86.352) ; v1(-25.204,132.429) -25.204,133.078 -22.26,136.023 -11.937,136.023 -1.914,146.046 -1.09,146.046 U31.9@-1.069,146.067
  Int3 (Sign) w0.09: *.36@-41.409,95.703 ccw(c-41.409,94.437) -42.675,94.437 -42.675,88.02 ccw(c-40.305,88.02) -40.305,85.65 -38.99,85.65 -38.112,86.528 -38.107,86.528 -36.282,88.353 v1(-28.479,88.353)
  Bottom Layer w0.09: *.36@-41.409,95.703 -40.35,96.762 ccw(c-42.146,98.558) -39.606,98.558 -39.606,105.888 cw(c-38.695,105.888) -39.339,106.533 ccw(c-40.173,107.366) -38.994,107.366 -38.994,110.069 cw(c-38.118,110.069) -38.737,110.689 ccw(c-40.401,112.352) -38.048,112.352 -38.048,123.227 cw(c-35.817,123.227) -37.395,124.804 -36.041,126.158 ccw(c-37.264,127.38) -35.535,127.38 -35.535,130.916 cw(c-32.995,130.916) -34.791,132.712 cw(c-33.456,131.378) -33.456,133.265 -25.604,133.265 cw(c-25.604,132.865) -25.204,132.865 v1(-25.204,132.429) ; v1(-15.035,86.352) -14.569,86.818 -11.693,86.818 -11.298,86.423 U24.26@-9.93,86.423
A6: *.17 U16.12 U23.3 U31.10 | length 59.7
  Top Layer w0.09: v1(-32.341,134.89) -31.967,134.918 cw(c-31.961,134.828) -31.961,134.918 U16.12@-30.857,134.918
  Int2 (Sign) w0.09: v1(-12.026,136.902) -3.705,145.223 -3.705,145.971 U31.10@-3.609,146.067
  Int3 (Sign) w0.09: v1(-32.341,134.89) -24.108,134.89 ccw(c-24.108,136.35) -23.076,135.318 cw(c-21.374,133.616) -21.374,136.023 -13.957,136.023 ccw(c-13.957,138.563) -12.161,136.767 v1(-12.026,136.902)
  Int3 (Sign) w0.127: *.17@-43.949,118.563 -43.419,119.093 ccw(c-45.215,120.889) -42.675,120.889 -42.675,121.5 cw(c-41.955,121.5) -41.955,122.22 -41.004,122.22 ccw(c-41.004,123.404) -40.167,122.567 -38.77,123.963 cw(c-38.164,123.358) -38.252,124.21 ; -38.164,124.214 ccw(c-38.164,123.358) -38.252,124.21 ; v1(-32.341,134.89) -32.793,134.884 cw(c-32.795,135.011) -32.795,134.884 -35.97,134.884 ccw(c-35.97,134.029) -36.825,134.029 -36.825,125.329 cw(c-37.696,125.329) -37.08,124.713 cw(c-38.297,125.93) -38.252,124.21
A7: *.32 U16.38 U24.4 U31.11 | length 74.8
  Top Layer w0.09: U16.38@-23.952,137.718 v1(-22.803,137.718)
  Top Layer w0.127: v1(-24.851,137.347) -24.799,137.347 -24.549,137.598 -24.459,137.598 -24.375,137.682 -23.988,137.682 U16.38@-23.952,137.718
  Int3 (Sign) w0.09: v1(-22.803,137.718) cw(c-22.104,138.417) -23.092,138.417 -23.092,141.472 cw(c-21.715,141.472) -22.689,142.446 -21.764,143.371 cw(c-21.081,142.688) -21.081,143.654 -9.614,143.654 ccw(c-9.614,146.194) -7.818,144.398 U31.11@-6.149,146.067
  Bottom Layer w0.127: *.32@-41.409,100.783 ccw(c-41.409,102) -40.192,102 -40.192,106.099 cw(c-39.245,106.099) -39.915,106.769 ccw(c-40.838,107.692) -39.533,107.692 -39.533,110.446 cw(c-38.551,110.446) -39.245,111.14 ccw(c-40.374,112.269) -38.778,112.269 -38.778,123.732 cw(c-36.238,123.732) -38.034,125.528 -37.295,126.267 ccw(c-39.091,128.063) -36.551,128.063 -36.551,135.449 cw(c-35.014,135.449) -36.1,136.536 -35.635,137.002 cw(c-33.839,135.206) -33.839,137.746 -32.186,137.746 -32.164,137.724 -31.808,137.724 -31.42,137.336 ccw(c-30.41,138.347) -30.41,136.918 -25.83,136.918 -25.222,136.918 -24.851,137.289 v1(-24.851,137.347)
AB0_3: U5.29 U6.31 | length 20.6
  Int3 (Sign) w0.09: v1(-36.933,106.514) -33.727,109.721 -27.992,109.721 -27.894,109.623 -22.159,109.623 v1(-21.77,109.233)
  Bottom Layer w0.09: U5.29@-38.048,106.533 -38.03,106.514 v1(-36.933,106.514) ; U6.31@-24.048,108.133 -23.154,108.133 -22.145,109.142 -21.822,109.142 -21.77,109.195 v1(-21.77,109.233)
AB1_3: U5.28 U6.30 | length 18.1
  Int3 (Sign) w0.09: v1(-36.773,105.557) -36.247,105.557 -33.36,108.444 -23.67,108.444 -23.002,107.776 v1(-23.002,107.352)
  Bottom Layer w0.09: U5.28@-38.048,105.733 -38.034,105.719 -37.019,105.719 -36.857,105.557 v1(-36.773,105.557) ; U6.30@-24.048,107.333 -24.029,107.352 v1(-23.002,107.352)
AC0_3: U5.27 U7.31 | length 61.7
  Int2 (Sign) w0.09: v1(-36.926,104.933) -36.673,105.185 -36.619,105.185 -35.785,106.02 -35.785,106.074 -34.517,107.341 -26.682,107.341 -25.97,106.629 -20.623,106.629 -20.469,106.783 -16.055,106.783 -15.89,106.948 -12.6,106.948 -12.524,106.873 -8.926,106.873 -8.905,106.894 14.138,106.894 14.585,107.341 18.916,107.341 19.782,108.207 v1(19.782,108.213)
  Bottom Layer w0.09: U5.27@-38.048,104.933 v1(-36.926,104.933) ; U7.31@17.952,108.148 19.633,108.148 19.698,108.213 v1(19.782,108.213)
AC1_3: U5.26 U7.30 | length 57.8
  Bottom Layer w0.09: U5.26@-38.048,104.133 -36.901,104.133 -33.613,107.422 -28.177,107.422 -27.866,107.733 -20.936,107.733 -20.77,107.899 -15.249,107.899 -15.088,107.738 -11.843,107.738 -11.838,107.743 16.157,107.743 16.552,107.348 U7.30@17.952,107.348
AD0_3: U5.3 U8.31 | length 65.5
  Int2 (Sign) w0.09: v1(-28.567,106.969) -27.684,106.086 -14.597,106.086 -14.061,106.621 -13.222,106.621 -12.959,106.358 v1(-0.572,106.358)
  Int3 (Sign) w0.09: v1(-28.567,106.969) -28.567,106.972 -28.331,107.207 v1(-28.331,107.794) ; v1(-0.572,106.358) -0.39,106.358 -0.2,106.548 14.752,106.548 15.552,107.348 29.891,107.348 30.679,108.135 v1(32.292,108.135)
  Bottom Layer w0.09: v1(-28.331,107.794) -28.012,108.113 -26.598,108.113 U5.3@-26.578,108.133 ; U8.31@31.952,108.148 32.279,108.148 v1(32.292,108.135)
AD1_3: U5.4 U8.30 | length 60.5
  Int3 (Sign) w0.09: v1(-26.148,107.333) -25.504,107.333 -25.147,106.976 -21.229,106.976 -21.177,106.923 -21.177,106.847 -20.959,106.629 -17.193,106.629 -15.893,107.928 -11.186,107.928 -10.874,107.617 -2.357,107.617 -0.726,105.986 4.693,105.986 5.065,106.358 14.831,106.358 15.323,106.849 17.081,106.849 17.107,106.824 30.919,106.824 31.354,107.26 31.625,107.26 v1(31.685,107.319)
  Bottom Layer w0.09: U5.4@-26.578,107.333 v1(-26.148,107.333)
ADC_BUFF_5V_0_1: TP8.1 U2.1 U2.2 U13.41 | length 48.3
  Top Layer w0.127: U13.41@35.26,137.935 v2(36.918,137.935)
  Bottom Layer w0.09: U2.2@-0.505,128.008 ccw(c-2.097,129.599) 0.154,129.599 0.154,130.945 cw(c2.239,130.945) 0.765,132.42 cw(c1.525,131.66) 1.525,132.735 17.299,132.735 ccw(c17.299,135.275) 19.095,133.479 23.628,138.013 cw(c25.424,136.216) 25.424,138.756 35.044,138.756 cw(c35.044,136.216) 36.84,138.013 v2(36.918,137.935)
  Bottom Layer w0.5: TP8.1@-3.609,128.008 U2.1@-1.775,128.008 U2.2@-0.505,128.008
ADC_BUFF_5V_1_1: TP9.1 U2.8 U2.9 U13.40 | length 46.6
  Top Layer w0.127: U13.40@35.26,137.535 35.265,137.54 36.387,137.54 v2(36.392,137.545)
  Bottom Layer w0.09: U2.8@5.845,122.358 cw(c6.127,122.358) 6.127,122.64 12.88,122.64 ccw(c12.88,125.18) 15.42,125.18 15.42,131.475 cw(c16.2,131.475) 16.2,132.255 17.343,132.255 ccw(c17.343,134.795) 19.139,132.999 24.075,137.935 cw(c25.041,136.969) 25.041,138.335 34.551,138.335 cw(c34.551,135.795) 36.347,137.591 v2(36.392,137.545)